# Altium PCB 便携T12烙铁.PcbDoc
Units mil, origin at the board's own origin, x right, y up, seen from the top; angles counter-clockwise.
Board outline 3937 x 590.5 mil, 2 copper layers (Top Layer, Bottom Layer); 31 components, 22 nets, 121 pads, 37 vias.
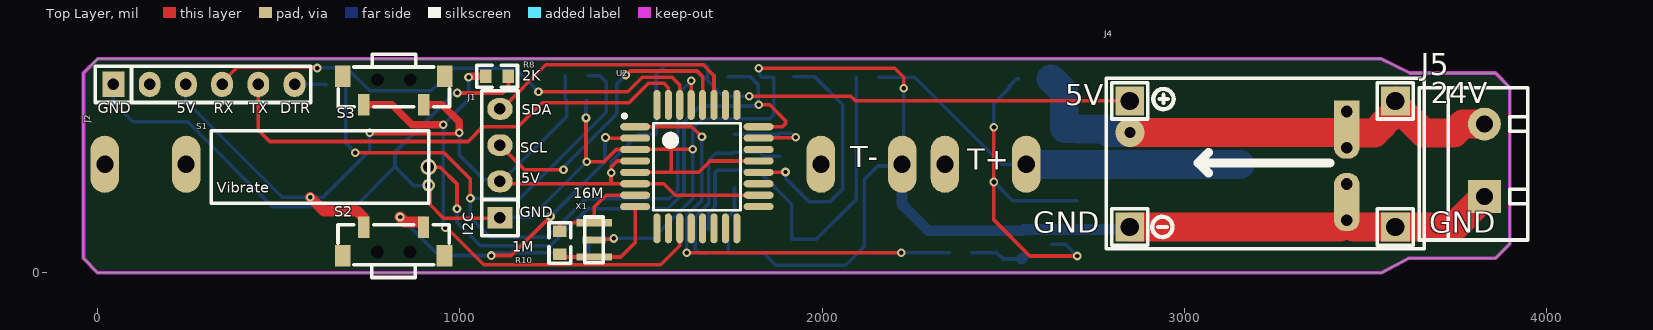
[diagram p0: Top Layer view]
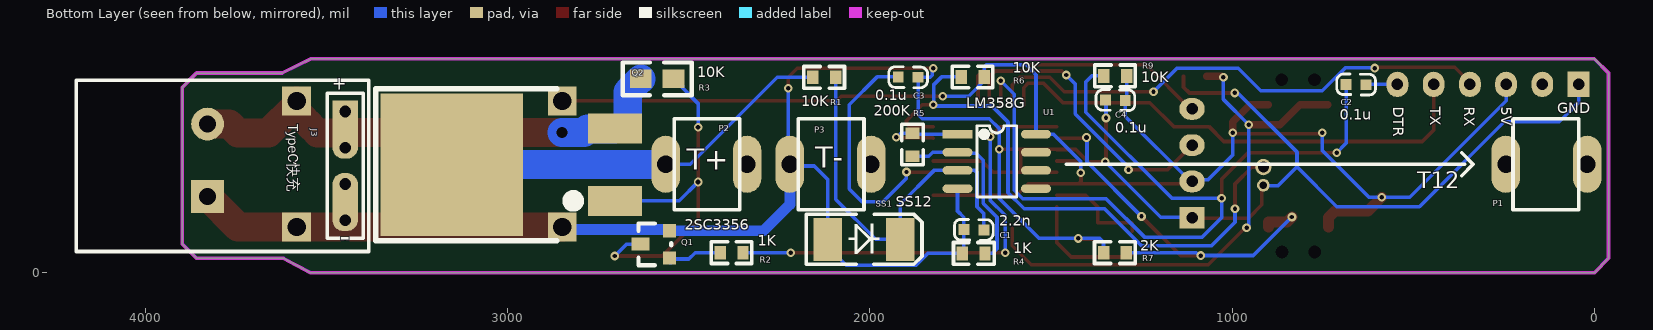
[diagram p1: Bottom Layer view, seen from below]

## Layer stack, top to bottom
Top Solder: solder mask 0.4, Solder Resist, Dk 3.5
Top Layer: signal copper 1.4
Dielectric 1: dielectric 12.6, FR-4, Dk 4.8
Bottom Layer: signal copper 1.4
Bottom Solder: solder mask 0.4, Solder Resist, Dk 3.5

## Board outline
-38.8,39.7 -38.8,551.1 0.6,590.5 3542.5,590.5 3622.6,551.1 3858.6,551.1 3898.2,511.2 3898.2,79.2 3858.4,39.3 3618.7,39.3 3543.8,0 0,0

## Design rules (kind name [scope] priority, off if disabled: settings)
Clearance [All] p1: gap=7 ignorepadtopadclearanceinfootprint=FALSE except(0: Arc-Hole Track-Hole SMDPad-Hole THPad-Hole Via-Hole Fill-Hole Poly-Hole Region-Hole Text-Hole)
DiffPairsRouting [All] p1: maxlimit=10 minlimit=10 mostfreqgap=10 toplayer_minwidth=15 toplayer_maxwidth=100 toplayer_prefwidth=15 bottomlayer_minwidth=15 bottomlayer_maxwidth=100 bottomlayer_prefwidth=15 maxuncoupledlength=500
PolygonConnect [All] p1: connectstyle=Relief reliefconductorwidth=10 reliefentries=4 polygonreliefangle="90 Angle" airgapwidth=10
RoutingVias [All] p1: holewidth=28 width=50 viastyle="Through Hole" minholewidth=13 minwidth=15 maxholewidth=100 maxwidth=100
SolderMaskExpansion [All] p1: expansion=4 istentingtop=FALSE
Width [All] p1: maxlimit=100 minlimit=10 preferedwidth=10 minimp=50.000000 maximp=50.000000 favimp=50.000000
29 further rules are at their usual default settings.

## Components (designator, comment, footprint, x,y, rotation, side; value= is the part's Value field where it differs from the comment)
C1 "2.2n" 0603C 1740.76,119.5 r180 bottom
C2 "0.1u" 0603C 630.39,518.3 r0 bottom
C3 "0.1u" 0603C 1922.11,540.6 r180 bottom
C4 "0.1u" 0603C 1294.84,474.9 r0 bottom
J1 "Pin HDR1X4" "PIN HDR1X4/2.54MM-S" 1110.8,151.9 r180 top
J2 "下载接口" "PIN HDR1X6/2.54MM-S" 43.9,519.6 r90 top
J3 "ip2721D快充SCH封装" IP2721D快充PCB封装 3675.26,226.16 r180 bottom
J4 "Pin HDR1X2" MP1584EN稳压PCB封装 2974.26,-93.84 r0 top
J5 "KF301-2P" KF301-5.0-2P 3828.26,210.16 r90 top
P1 "保险丝夹子" FUSE-5X20 20.26,299.16 r180 bottom
P2 "保险丝夹子" FUSE-5X20 2563.56,299.16 r0 bottom
P3 "保险丝夹子" FUSE-5X20 2221.07,299.2 r0 bottom
Q1 "NPN" SOT-23 2588.6,75.7 r90 bottom
Q2 "P-MOS" TO263-3B 3154.05,298.16 r90 bottom
R1 "10K" 0603R 2157.25,539.16 r180 bottom
R2 "1K" 0603R 2413.26,55.16 r180 bottom
R3 "10K" 0805R 2542.26,535.16 r0 bottom
R4 "1K" 0603R 1682.27,53.16 r0 bottom
R5 "200K" 0603R 1882.55,384.59 r270 bottom
R6 "10K" 0603R 1747.69,540.25 r180 bottom
R7 "2K" 0603R 1354.99,55.1 r180 bottom
R8 "2K" 0603R 1134.25,542.16 r180 top
R9 "10K" 0603R 1354.26,543.16 r180 bottom
R10 "1M" 0603R 1276.2,51.11 r90 top
S1 "S" S 914,291.3 r90 top
S2 "SW" "TSW 3*6*4.3-S-W" 817.23,56.77 r0 top
S3 "SW" "TSW 3*6*4.3-S-W" 817.88,532.62 r180 top
SS1 "1N5819" SMA/DO-214AC 2111.4,91.85 r180 bottom
U1 "LM358G-S08-R" SOP8 1758.08,382.17 r180 bottom
U2 "ATMEGA328P-AU" "TQFP32 7X7_M" 1654.44,292.45 r270 top
X1 "16MHZ" 晶振3213 1370.7,137.7 r0 top

## Footprints (in the part's own frame and the unit in brackets; to place one, negate y for a bottom-side part, rotate by r counter-clockwise, add the part's x,y. Pads: shape width x height; smd on the part's side, far side on the other; paste and mask are expansions set on the pad)
0603C [mil] "电容"
  rect 30x30 smd: 1(0.21,-0.35) 2(55.21,-1.35)
  silkscreen extent -26,-30 81,28, body extent -1,-15 62,16, height 12
0603R [mm] "电阻"
  rect 0.8x0.965 smd: 1(0,0) 2(1.6,0)
  silkscreen extent -0.64,-0.76 2.21,0.76, body extent -0.04,-0.41 1.56,0.41, height 0.45
0805R [mil] "电阻"
  rect 60x50 smd: 1(0,0) 2(90,0)
  silkscreen extent -50,-45 140,45, body extent 1,-25 80,25, height 15
FUSE-5X20 [mm] "保险丝夹子"
  oval 2x4 hole 1.2: 1(0,0) 2(-5.7,0)
  silkscreen extent -5.2,-3.2 -0.6,3.2
IP2721D快充PCB封装 [mil]
  oval 70x60 hole 32: 1(226.84,118.59) 2(226.84,-81.41) 2(226.84,18.59)
  rrect50% 70x110 all layers, no hole: 1(226.84,159.59)
  rect 70x60 hole 32: 1(226.84,218.59)
  rrect50% 70x130 all layers, no hole: 2(226.84,-28.41)
  silkscreen extent -515,-168 292,305, body extent 177,-131 277,269, height 336
KF301-5.0-2P [mm] "可拼接端子/6A"
  rect 2.3x2.3 hole 1.2: 1(0,0)
  round 2.3 hole 1.2: 2(5.08,0)
  silkscreen extent -3.05,-3.05 7.62,4.57, body extent -3,-3.09 7.5,4.51, height 10.05
MP1584EN稳压PCB封装 [mil]
  rect 80x80 hole 50: IN+(608,568) IN-(608,220) OUT+(-125,568) OUT-(-125,220)
  silkscreen extent -190,160 688,630, body extent -175,70 658,718, height 336
"PIN HDR1X4/2.54MM-S" [mil] "0.91 i2c oled"
  rect 70x60 hole 32: 1(0,0)
  oval 70x60 hole 32: 2(0,-100) 3(0,-200) 4(0,-300)
  silkscreen extent -50,-350 50,50, body extent -50,-350 50,50, height 336
"PIN HDR1X6/2.54MM-S" [mil] "下载接口"
  rect 70x60 hole 32: 1(0,0)
  oval 70x60 hole 32: 2(0,-100) 3(0,-200) 4(0,-300) 5(0,-400) 6(0,-500)
  silkscreen extent -50,-545 50,50, body extent -50,-545 50,55, height 336
S [mil] "震动开关"
  round 45 hole 30: 1(0,0)
  round 35 hole 20: 2(-50,0)
  silkscreen extent -100,0 100,600, body extent -69,-5 49,396, height 119
SMA/DO-214AC [mm] "塑封二极管"
  rect 2x3 smd: A(-0.127,0) K(4.953,0)
  silkscreen extent -1.63,-1.75 6.48,1.75, body extent 0.11,-1.35 4.71,1.35, height 2.4
SOP8 [mm] "LM358G-S08-R"
  rect 2.1x0.6 smd: 1(0,0)
  oval 2.1x0.6 smd: 2(0,-1.27) 3(0,-2.54) 4(0,-3.81) 5(5.5,-3.81) 6(5.5,-2.54) 7(5.5,-1.27) 8(5.5,0)
  silkscreen extent 1.35,-4.41 4.15,0.6, body extent -0.21,-4.4 5.8,0.6, height 1.9
SOT-23 [mil] "三极管"
  rect 36x36 smd: B(-35,-35) E(40,-35)
  rect 36x50 smd: C(3,45)
  silkscreen extent -55,-40 60,50, body extent -54,-48 60,62, height 47
TO263-3B [mm] "P-MOS"
  rect 10x10 smd: D(0,0)
  rect 2.1x3.8 smd: G(-2.54,-11.45) S(2.54,-11.45)
  silkscreen extent -5.33,-8.89 5.33,5.33, body extent -4.92,-11.05 5.08,3.88, height 4.5
"TQFP32 7X7_M" [mm] "32脚，体宽：7x7mm, 脚距：0.8mm ATMEGA328P-AU"
  oval 0.5x2.1 smd: 1(-2.803,-4.327) 2(-2.003,-4.327) 3(-1.203,-4.327) 4(-0.403,-4.327) 5(0.397,-4.327) 6(1.197,-4.327) 7(1.997,-4.327) 8(2.797,-4.327) 17(2.797,4.327) 18(1.997,4.327) 19(1.197,4.327) 20(0.397,4.327) 21(-0.403,4.327) 22(-1.203,4.327) 23(-2.003,4.327) 24(-2.803,4.327)
  oval 2.1x0.5 smd: 9(4.324,-2.8) 10(4.324,-2) 11(4.324,-1.2) 12(4.324,-0.4) 13(4.324,0.4) 14(4.324,1.2) 15(4.324,2) 16(4.324,2.8) 25(-4.33,2.8) 26(-4.33,2) 27(-4.33,1.2) 28(-4.33,0.4) 29(-4.33,-0.4) 30(-4.33,-1.2) 31(-4.33,-2) 32(-4.33,-2.8)
  silkscreen extent -3.68,-5.2 3.05,3.05, body extent -4.5,-4.5 4.5,4.5, height 1.05
"TSW 3*6*4.3-S-W" [mm] "侧立贴片3*6*4.3"
  rect 1.1x1.5 smd: 0(-3.575,-0.25) 0(3.575,-0.25)
  round 0 hole 0.9: 0(-1.15,0) 0(1.15,0)
  rect 0.8x1.5 smd: 1(-2.1,1.75) 2(2.1,1.75)
  silkscreen extent -3.9,-1.78 3.9,1.91, body extent -3.9,-1.79 3.9,1.91, height 3.51
晶振3213 [mil] "晶振3213"
  rect 98.5x19.6 smd: 1(0,0) 3(0,-94.4)
  rect 63x19.6 smd: 2(-0.05,-47.2)
  silkscreen extent -26,-110 26,16, body extent -30,-110 29,16, height 24

## Part data
C1 C2 C3 C4: library part CAP, "无极性电容"
J1: "0.91 i2c oled"
J2: library part "Pin HDR1X6"
J4: library part MP1584EN稳压SCH封装
P1 P2 P3: "保险丝夹子 / 5X20"
Q1: "NPN三极管 / 2SC3356-T1B-A"
Q2: "P沟道场效应管 / IRF4905STRLPBF"
R1 R2 R3 R4 R5 R6 R7 R8 R9 R10: library part RES, "电阻"
S1: "震动开关 / SW180  建议SW18015"
S2 S3: "侧立按键开关 / 3*6*4.3"
SS1: library part "DIODE SCHOTTKY", "肖特基二极管SS12"
U1: "运放"
X1: library part 晶振3213, "晶振3213"

## Via types
v1: diameter 24.02, hole 12.2, Top Layer to Bottom Layer, 24 vias
v2: diameter 24.4, hole 12, Top Layer to Bottom Layer, 6 vias
v3: diameter 24, hole 13, Top Layer to Bottom Layer, 4 vias
v4: diameter 24/24 (per signal layer), hole 13, Top Layer to Bottom Layer, 2 vias
v5: diameter 80/24 (per signal layer), hole 30, Top Layer to Bottom Layer, 1 vias

## Nets (pads, with @x,y where several pads share a name; then routed paths per layer and width w, separated by ;. In a path a pad name is that pad's centre, name@x,y a point inside that pad or via, vN(x,y) a via of type N, cw(c..) or ccw(c..) an arc to the next point about the centre after c; other vN are vias at no path point)
5V: C4.1 J1.2 J2.3 J4.OUT+ R6.2 R9.2 S2.1 S3.1 U1.8 U2.4 U2.6 U2.18 | length 4521.7
  Top Layer w10: v3(751.26,386.16) 754.27,383.15 995.24,383.15 v1(998.25,386.17) ; J1.2 1117.39,245.31 1423.81,245.31 ; U2.4 1434.4,308.3 1417.95,291.85 v2(1417.95,275.55) 1417.22,274.82 1417.22,251.9 1423.81,245.31 ; v1(1798.65,487.15) 2079.27,487.15 2092.26,474.16 J4.OUT+ ; U2.18 1594.61,213.81 1563.11,245.31 U2.6 1423.81,245.31
  Top Layer w20: S3.1 950.7,463.72 998.25,416.17 v1(998.25,386.17)
  Top Layer w30: v1(587.26,208.16) 625.22,170.2 716.23,170.2 733.8,152.62 733.8,126.42 S2.1
  Bottom Layer w10: J2.3 243.9,474.52 510.26,208.16 v1(587.26,208.16) 622.48,208.16 751.26,336.94 v3(751.26,386.16) ; v1(998.25,386.17) 998.54,385.88 998.54,324.88 1066.84,256.58 1106.12,256.58 J1.2 1115.8,251.9 1295.05,431.15 C4.1 1291.27,479.03 R9.2 ; v2(1417.95,275.55) 1417.95,306.85 1493.27,382.17 U1.8 1541.54,546.44 1568.6,573.5 1678.92,573.5 1684.03,568.39 1684.03,540.92 R6.2 ; R6.2@1676.14,538.57 1727.55,487.15 v1(1798.65,487.15)
DTR: C2.1 J2.6 | length 87.1
  Bottom Layer w10: J2.6 629.65,519.6 C2.1
GND: C1.1 C3.2 C4.2 J1.1 J2.1 J3.2 J4.IN- J4.OUT- J5.1 P3.1 Q1.E R4.2 R7.1 R8.1 S1.2 SS1.A U1.4 U2.3 U2.5 U2.21 X1.2 | length 7406
  Top Layer w10: S1.2 918.04,237.26 918.04,187.38 955.26,150.16 1109.06,150.16 J1.1 ; v1(992.74,496.02) 1118.12,496.02 1134.25,512.15 R8.1 ; v1(1348.26,427.16) 1348.26,308.16 v1@1352.26,308.16 ; v1(1350.26,306.16) 1398.26,306.16 1431.9,339.8 U2.3 1485.26,340.97 1583.26,340.97 ; X1.2 1372.62,92.47 1423.27,92.47 v1(1425.25,94.45) ; U2.5 1583.26,276.81 ; v3(1642.76,340.66) 1642.45,340.97 1583.26,340.97 ; U2.21 1691.4,308.3 1659.91,276.81 1583.26,276.81 ; v1(1824.95,564.15) 2200.27,564.15 2225.26,539.16 v1(2225.26,509.16) ; 1583.26,276.81 1583.26,340.97
  Top Layer w80: J4.OUT- 3429.84,126.16 3448.42,144.75 3467.01,126.16 3744.26,126.16 J5.1
  Bottom Layer w10: J2.1 43.9,469.52 97.26,416.16 249.26,416.16 483.26,182.16 711.26,182.16 821.26,292.16 ; S1.2 912.1,239.4 874.02,239.4 821.26,292.16 ; v1(992.74,496.02) 990.06,493.34 981.77,493.34 821.26,332.83 821.26,292.16 ; J1.1 1112.07,153.17 1197.27,153.17 v1(1350.26,306.16) ; v1(1348.26,427.16) 1348.26,474.46 C4.2 ; R7.1 1355.26,55.37 1355.26,84.16 1365.55,94.45 v1(1425.25,94.45) 1532.55,94.45 1642.76,204.66 1642.76,397.66 1670.26,425.16 1855.4,425.16 1866.9,436.66 C3.2 1833.17,539.25 1827.63,544.79 1827.63,561.47 v1(1824.95,564.15) ; U1.4 1758.08,169.98 1741.26,153.16 1741.26,119.86 C1.1 1740.55,57.87 R4.2 1839.69,53.16 1872.06,20.8 2065.03,20.8 2116.4,72.16 SS1.A 2116.4,257.3 2153.45,294.35 P3.1@2221.07,294.35 ; P3.1 2225.26,303.39 v1(2225.26,509.16)
  Bottom Layer w30: P3.1 2221.07,294.35 2221.07,188.35 2293.72,115.7 Q1.E 2556.6,118.7 2841.8,118.7 J4.OUT-
Hall: R6.1 S1.1 U2.24 | length 1665
  Top Layer w10: S1.1 914.14,291.16 945.64,291.16 992.26,244.54 v2(992.26,176.29) ; U2.24 1890.89,402.79 1899.12,411.02 1899.12,419.3 1855.25,463.17 v1(1825.15,463.14)
  Bottom Layer w10: v2(992.26,176.29) 992.26,139.16 1057.26,74.16 1250.26,74.16 1352.26,176.16 1574.3,176.16 1618.76,220.62 1618.76,415.66 1663.25,460.15 1822.16,460.15 v1(1825.15,463.14) ; R6.1@1740.69,540.25 1802.17,540.25 1824.26,518.16 v1@1824.26,462.28
L_but: R7.2 S2.2 U2.2 | length 1159.7
  Top Layer w10: v1(1087.18,47.19) 1142.29,47.19 v1(1250.26,155.16) ; v3(1402.26,373.16) 1404.13,371.29 U2.2
  Top Layer w30: v2(835.26,153.51) 848.57,140.2 899.16,140.2 899.91,139.45 S2.2
  Bottom Layer w10: v2(835.26,153.51) 941.58,47.19 v1(1087.18,47.19) 1090.97,47.19 1098.88,55.1 R7.2 ; v1(1250.26,155.16) 1400.95,305.85 1400.95,371.85 v3(1402.26,373.16)
NetC3_1: C3.1 U2.20 | length 690.8
  Top Layer w10: U2.20 1825.32,277.33 1898.59,277.33 v1(1899.12,277.86)
  Bottom Layer w10: v1(1899.12,277.86) 1899.44,277.54 1899.44,259.98 1963.26,196.16 2022.26,196.16 2057.26,231.16 2057.26,463.16 1980.17,540.25 C3.1
NetQ1_B: Q1.B R2.1 | length 148.8
  Bottom Layer w10: R2.1 2482.26,55.16 2499.72,37.7 Q1.B@2550.6,37.7
  Bottom Layer w30: Q1.B@2550.6,37.7 Q1.B
NetQ1_C: Q1.C Q2.G R3.1 | length 1027.5
  Top Layer w10: v4(2474.26,401.16) v4(2474.26,250.16) 2474.26,145.16 2573.37,46.05 v1(2704.55,46.05)
  Bottom Layer w10: v4(2474.26,250.16) 2526.26,198.16 Q2.G ; v4(2474.26,401.16) 2474.26,467.16 2517.26,510.16 2517.26,515.16 2537.26,535.16 R3.1 ; Q1.C 2671.9,78.7 v1(2704.55,46.05)
NetR10_1: R10.1 U2.8 X1.3 | length 326.9
  Top Layer w10: R10.1 1284.01,43.3 X1.3 1444.4,43.3 1484.08,82.98 U2.8
NetR10_2: R10.2 U2.7 X1.1 | length 287.2
  Top Layer w10: R10.2 1276.26,114.16 1276.26,136.16 1277.8,137.7 X1.1 1370.7,180.6 1403.91,213.81 U2.7
PWM_MOS: R2.2 U2.1 | length 1257
  Top Layer w10: U2.1 1640.63,402.79 v1(1668.26,375.16) ; v1(1626.26,55.16) v1(2218.26,55.16)
  Bottom Layer w10: v1(1626.26,55.16) 1626.26,158.16 1668.26,200.16 v1(1668.26,375.16) ; v1(2218.26,55.16) R2.2
R_but: R8.2 S3.2 U2.11 | length 1496.1
  Top Layer w10: v1(960.26,124.16) 963.66,124.16 1066.32,21.5 1554.42,21.5 1579.22,46.31 1607.19,74.28 U2.11
  Top Layer w20: S3.2 812.7,463.72 868.26,408.16 v1(954.26,408.16) ; v2(1024.24,539.33) 1025.43,539.33 1028.26,542.16 R8.2
  Bottom Layer w10: v1(960.26,124.16) 954.26,130.16 v1(954.26,408.16) 1024.24,478.14 v2(1024.24,539.33)
Reset: C2.2 R9.1 U2.29 | length 2302.7
  Top Layer w10: v2(711.26,331.16) 956.26,331.16 1029.26,258.16 v2(1029.26,205.16) ; U2.29@1636.84,464.76 U2.29 v3(1638.69,529.73)
  Bottom Layer w10: C2.2 685.6,356.82 v2(711.26,331.16) ; R9.1 1387.26,543.16 1404.26,526.16 1404.26,443.16 1166.26,205.16 v2(1029.26,205.16) 1029.26,151.47 1082.57,98.16 1242.26,98.16 1348.26,204.16 1578.26,204.16 1601.26,227.16 1601.26,492.3 v3(1638.69,529.73)
RX: J2.4 U2.30 | length 1446.2
  Top Layer w10: J2.4 343.9,524.6 385.9,566.6 605.08,566.6 v1(606.92,564.76) ; v1(1217.26,499.16) 1463.26,499.16 1503.6,539.5 1585.92,539.5 1607.19,518.23 U2.30
  Bottom Layer w10: v1(606.92,564.76) 607.32,565.16 688.26,565.16 751.26,502.16 921.26,502.16 983.26,564.16 1152.26,564.16 v1(1217.26,499.16)
SCL: J1.3 U2.28 | length 837.2
  Top Layer w10: J1.3 1178.36,284.34 v1(1286.26,284.34) ; v1(1457.95,545.65) 1459.97,545.65 1470.82,556.5 1654.92,556.5 1670.18,541.24 U2.28
  Bottom Layer w10: v1(1286.26,284.34) 1286.26,291.1 1433.26,438.1 1433.26,520.96 v1(1457.95,545.65)
SDA: J1.4 U2.27 | length 734.4
  Top Layer w10: J1.4 1115.8,451.9 1237.4,573.5 1671.92,573.5 1701.68,543.74 U2.27
TEMP: R5.1 U1.1 U2.23 | length 278.1
  Top Layer w10: U2.23 1826.22,372.72 1925.82,372.72 v1(1927.25,374.15)
  Bottom Layer w10: U1.1 1880.13,382.17 R5.1 1914.92,384.59 1925.36,374.15 v1(1927.25,374.15)
TEMP_sense: P2.1 Q2.D R1.1 | length 1096.6
  Bottom Layer w10: R1.1 2256.16,539.16 2496.16,299.16 P2.1
  Bottom Layer w80: P2.1 3153.05,299.16 Q2.D
TX: J2.5 U2.31 | length 1390
  Top Layer w10: J2.5 443.9,393.52 475.26,362.16 1023.26,362.16 1064.26,403.16 1161.26,403.16 1227.26,469.16 1467.26,469.16 1520.6,522.5 1563.92,522.5 1575.7,510.72 U2.31
V+: C1.2 R1.2 SS1.K U1.3 | length 1076.8
  Bottom Layer w10: C1.2 1685.55,163.37 1704.26,182.08 1704.26,276.31 1710.12,282.17 U1.3 1823.25,282.17 1916.4,189.02 SS1.K 1983.95,91.85 2094.26,202.16 R1.2
V-: R4.1 R5.2 U1.2 | length 507.3
  Bottom Layer w10: R4.1 1662.26,53.16 1649.26,66.16 1649.26,153.16 1687.26,191.16 1687.26,310.16 1706.66,329.56 1755.47,329.56 U1.2 1826.25,332.17 1837.26,321.16 1882.11,321.16 R5.2
VCC: J3.1 J4.IN+ J5.2 Q2.S R3.2 | length 1391.9
  Top Layer w80: v5(2850.26,387.16) 3447.01,387.16 3448.42,385.75 3524.4,385.75 3548.54,409.88 ; 3563.54,424.88 3582.26,443.61 J4.IN+@3582.26,463.75 ; J4.IN+ J4.IN+@3582.26,463.75 ; J5.2 3769.26,410.16 3744.85,385.75 3660.26,385.75 J4.IN+@3582.26,463.75
  Bottom Layer w80: R3.2 2668.46,498.96 2668.46,399.5 2669.8,398.16 Q2.S 2704.6,396.82 2780.13,396.82 2789.79,387.16 v5(2850.26,387.16)
pads on no net: J2.2 P1.1 P1.2 P2.2 P3.2 S2.0 S3.0 U1.5 U1.6 U1.7 U2.9 U2.10 U2.12 U2.13 U2.14 U2.15 U2.16 U2.17 U2.19 U2.22 U2.25 U2.26 U2.32

## Keep-outs
Keep-Out Layer:
  the board outline again, w10

## Silkscreen, mask and mechanical layers (free items; w line width, h text height)
Top Overlay:
  text "2K" at 1172.26,520.16 h50
  text "24V" at 3680.26,448.16 h100
  text "5V" at 2671.26,442.16 h100
  text "5V" at 219.26,430.71 h50
  text "GND" at 1.26,430.5 h50
  text "RX" at 321.26,430.38 h50
  text "TX" at 419.26,430.38 h50
  text "DTR" at 504.26,430.38 h50
  text "SDA" at 1171.17,425.95 h50
  text "SCL" at 1167.23,320.83 h50
  text "T-" at 2077.26,271.16 h100
  text "T+" at 2401.26,265.16 h100
  text "5V" at 1170.12,236.64 h50
  text "Vibrate" at 329.41,211.46 h50
  text "16M" at 1313.26,196.16 h50
  text "GND" at 1166.12,142.64 h50
  text "I2C" at 1047.35,101.96 h50 r90
  text "GND" at 3676.26,91.16 h100
  text "GND" at 2582.26,90.16 h100
  text "1M" at 1144.26,48.16 h50
Bottom Overlay:
  lines w9.84: 358.8,299.2 1457.3,299.2 ; 366.7,267.7 335.2,299.2 366.7,330.7
  text "10K" at 1605.26,542.16 h50
  text "10K" at 2477.26,530.16 h50
  text "10K" at 1251.26,516.16 h50
  text "0.1u" at 1985.26,466.16 h50
  text "5V" at 266.71,458.16 h50 r90
  text "RX" at 369.26,458.16 h50 r90
  text "TX" at 463.26,458.16 h50 r90
  text "DTR" at 565.26,458.16 h50 r90
  text "10K" at 2189.26,450.16 h50
  text "LM358G" at 1734.26,444.16 h50
  text "GND" at 103.08,429.82 h50
  text "200K" at 1989.26,423.16 h50
  text "0.1u" at 703.26,412.16 h50
  text "TypeC快充" at 3615.26,409.16 h50 r90
  text "0.1u" at 1323.26,376.16 h50
  text "T-" at 2151.26,270.16 h100
  text "T+" at 2506.26,265.16 h100
  text "T12" at 488.84,233.29 h45
  text "SS12" at 1928.26,172.16 h50
  text "2.2n" at 1643.26,120.16 h50
  text "2SC3356" at 2511.26,108.16 h50
  text "1K" at 2309.26,64.16 h50
  text "2K" at 1253.26,50.16 h50
  text "1K" at 1604.26,44.16 h50
Mechanical 1:
  lines w10: -38.8,39.7 -38.8,551.1 0.6,590.5 3542.5,590.5 3622.6,551.1 3858.6,551.1 3898.2,511.2 3898.2,79.2 3858.4,39.3 3618.7,39.3 3543.8,0 0,0 0,0.9 -38.8,39.7
Mechanical 15:
  lines w0.1: 1868.27,195.21 1870.27,197.21 ; 1874.62,828.61 1876.62,830.61

## Text inside footprints (layer, text, board x,y; h text height)
J3: Bottom Overlay "+" at 3443.51,492.26 h60; Bottom Overlay "-" at 3434.51,52.26 h100